# Altium PCB SPARKy watch PCB blank - David.PcbDoc
Units mm, origin at the board's own origin, x right, y up, seen from the top; angles counter-clockwise.
Board outline 50 x 29.64 mm, 2 copper layers (Component Side, Bottom Layer), stack 0.325 mm thick; 94 components, 72 nets, 347 pads, 9 vias.
Unrouted connection lines stored in the file: 240.
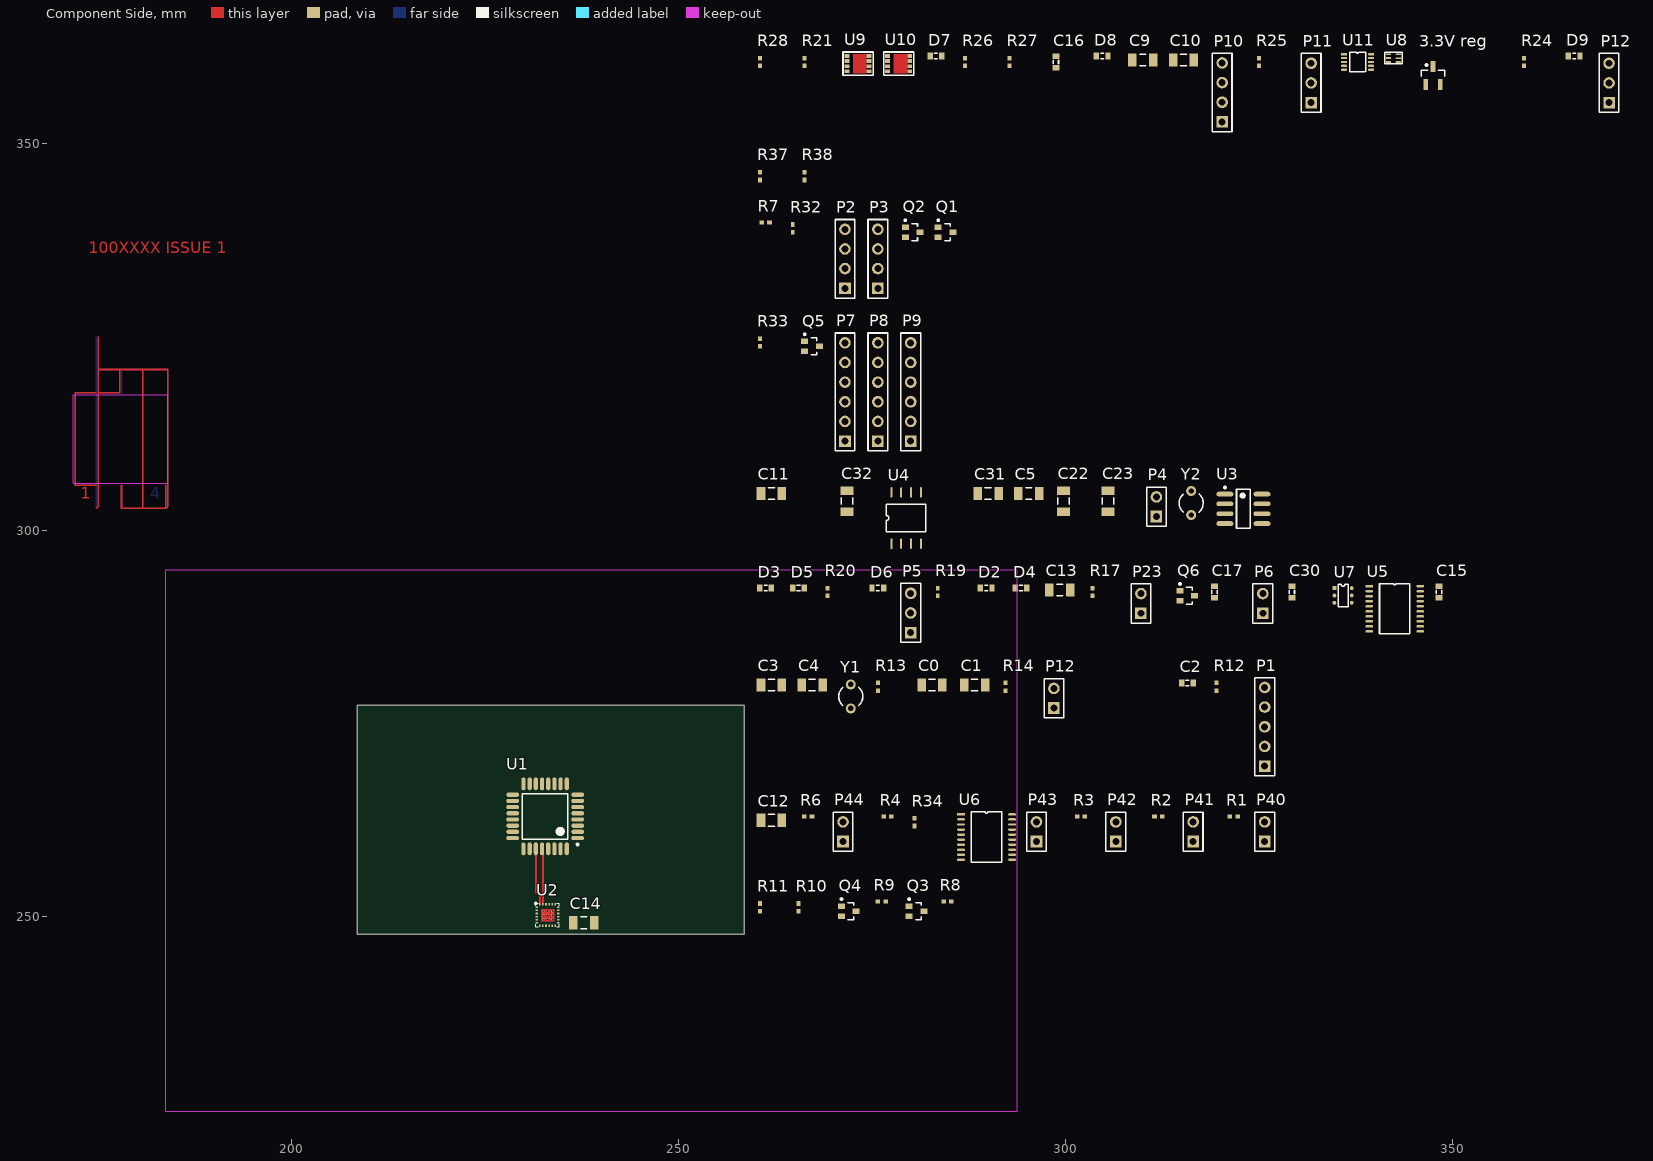
[diagram p0: Component Side view]
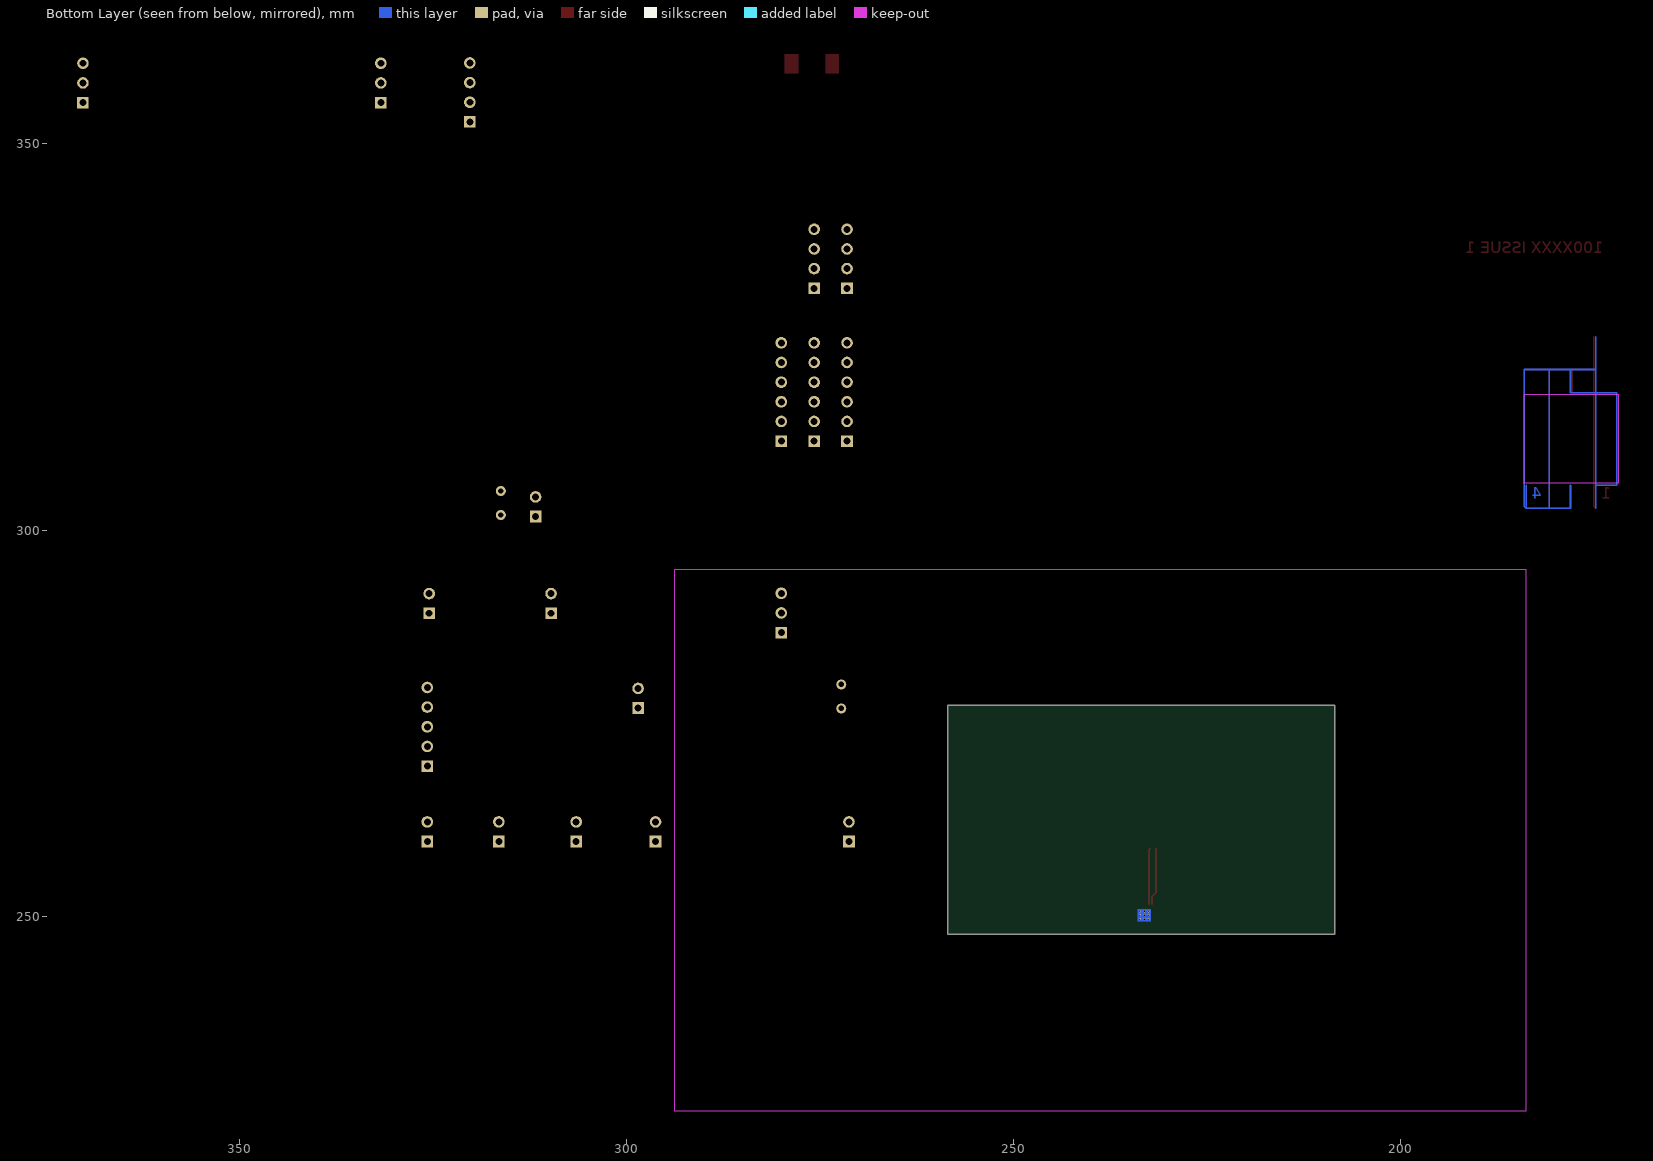
[diagram p1: Bottom Layer view, seen from below]

## Layer stack, top to bottom
Top Solder: solder mask 0.0102, Solder Resist, Dk 3.5
Component Side: signal copper 0.0356
Dielectric 1: core 0.254, FR-4, Dk 4.2
Bottom Layer: signal copper 0.0356
Solder Side: solder mask 0.0102, Solder Resist, Dk 3.5

## Board outline
208.5,247.75 208.5,277.387 258.5,277.387 258.5,247.75

## Design rules (kind name [scope] priority, off if disabled: settings)
AcuteAngle [All] p1: minimum=9.00000000000000E+0001 checktracksonly=FALSE
AssemblyTestpoint [All] p1: testpointundercomponent=TRUE minsize=1 maxsize=2.5 preferedsize=1.5 minholesize=0 maxholesize=1 preferedholesize=0.8 testpointgrid=0.025 usegrid=TRUE gridtolerance=0 allowsidetop=TRUE allowsidebottom=TRUE
Clearance "Clearance Ceramic to Board" [InComponentClass('Ceramic') vs ((ObjectKind = 'Arc') Or (ObjectKind = 'Track')) And (Layer = 'KeepOutLayer') And (Keepout = 'False')] p1: gap=4.95 // Ceramic component to board outline
Clearance [All] p2: gap=0.15
ComponentClearance [All] p1: gap=0.25 collisioncheckmode=3 verticalgap=0.25 showdistances=FALSE
DiffPairsRouting [All] p1: maxlimit=0.1 minlimit=0.1 mostfreqgap=0.1 toplayer_minwidth=0.15 toplayer_maxwidth=0.15 toplayer_prefwidth=0.15 bottomlayer_minwidth=0.15 bottomlayer_maxwidth=0.15 bottomlayer_prefwidth=0.15 maxuncoupledlength=12.7
FabricationTestpoint [All] p1: side=3 testpointundercomponent=TRUE minsize=1 maxsize=2.5 preferedsize=1.5 minholesize=0 maxholesize=1 preferedholesize=0.8 testpointgrid=0.025 allowsidetop=TRUE allowsidebottom=TRUE usegrid=TRUE gridtolerance=0
Height [All] p1: minheight=0 maxheight=50 prefheight=12.5
HoleSize [All] p1: absolutevalues=TRUE maxlimit=6.5 minlimit=0.3 maxpercent=80.000 minpercent=20.000
HoleToHoleClearance [All] p1: gap=0.25 allowstackedmicrovias=TRUE
MinimumAnnularRing [All] p1: minimumring=0.15
MinimumSolderMaskSliver [All] p1: minsoldermaskwidth=0.15
PlaneClearance [All] p1: clearance=0.5
PlaneConnect [All] p1: planeconnectstyle=Relief reliefexpansion=0.5 reliefentries=4 reliefconductorwidth=0.25 reliefairgap=0.25
PolygonConnect [All] p1: connectstyle=Relief reliefconductorwidth=0.25 reliefentries=4 polygonreliefangle="90 Angle" airgapwidth=0.25
RoutingCorners [All] p1: cornerstyle=45-Degree minsetback=2.5 maxsetback=2.5
RoutingVias [All] p1: holewidth=0.5 width=0.8 viastyle="Through Hole" minholewidth=0.3 minwidth=0.6 maxholewidth=0.7 maxwidth=1
SilkToSilkClearance [All] p1: silktosilkclearance=0.25
SilkToSolderMaskClearance [IsPad] p1: minsilkscreentomaskgap=0.25 clearancetoexposedcopper=TRUE
SolderMaskExpansion [All] p1: expansion=0.075
UnpouredPolygon [All] p1: allowunpoured=FALSE
Width [All] p1: maxlimit=1 minlimit=0.15 preferedwidth=0.2
16 further rules are at their usual default settings.

## Classes and differential pairs
component class "battery sensor": Q3 Q4 R8 R9 R10 R11
component class Designator: C12 P40 P41 P42 P43 P44 R1 R2 R3 R4 R6 R34 U6
component class Prefrels: C13 C15 C17 C30 D2 D3 D4 D5 D6 P5 P6 P23 Q6 R17 R19 R20 U5 U7
component class RTC: C5 C11 C14 C22 C23 C31 C32 P4 U2 U3 U4 Y2
component class Screens: P7 P8 P9 Q5 R33
component class "Serial devices": P2 P3 Q1 Q2 R7 R32
component class "SparkyTime Project": R37 R38
component class "V stuff": "3.3V reg" C9 C10 C16 D7 D8 D9 P10 P11 P12 R21 R24 R25 R26 R27 R28 U8 U9 U10 U11

## Components (designator, comment, footprint, x,y, rotation, side; value= is the part's Value field where it differs from the comment)
"3.3V reg" "Volt Reg" SOT23_M 347.499,358.749 r90 top
C0 "Cap Semi" C1206 282.749,279.999 r0 top
C1 "Cap Semi" C1206 288.249,279.999 r0 top
C2 "Cap" J1-0603 315.749,280.249 r0 top
C3 "Cap Semi" C1206 261.999,279.999 r0 top
C4 "Cap Semi" C1206 267.249,279.999 r0 top
C5 "Cap Semi" C1206 295.249,304.749 r0 top
C9 "Cap Semi" C1206 309.999,360.749 r0 top
C10 "Cap Semi" C1206 315.249,360.749 r0 top
C11 "Cap Semi" C1206 261.999,304.749 r0 top
C12 "Cap Semi" C1206 261.999,262.499 r0 top
C13 "Cap Semi" C1206 299.249,292.249 r0 top
C14 "Cap Semi" C1206 237.75,249.25 r0 top
C15 "Cap" J1-0603 348.249,291.999 r90 top
C16 "Cap" J1-0603 298.749,360.499 r90 top
C17 "Cap" J1-0603 319.249,291.999 r90 top
C22 "Cap" C1206 299.749,303.749 r90 top
C23 "Cap" C1206 305.499,303.749 r90 top
C30 "C16" J1-0603 329.249,291.999 r90 top
C31 "Cap Semi" C1206 289.999,304.749 r0 top
C32 "Cap Semi" C1206 271.749,303.749 r90 top
D2 "Diode" J1-0603 289.749,292.499 r0 top
D3 "Diode" J1-0603 261.249,292.499 r0 top
D4 "Diode" J1-0603 294.249,292.499 r0 top
D5 "Diode" J1-0603 265.499,292.499 r0 top
D6 "de ??" J1-0603 275.749,292.499 r0 top
D7 "FULL" J1-0603 283.249,361.249 r0 top
D8 "Chargeing" J1-0603 304.749,361.249 r0 top
D9 "power ok" J1-0603 365.749,361.249 r0 top
P1 "FTDI headder" HDR1X5 325.749,269.499 r90 top
P2 "ESP8266" HDR1X4 271.499,331.249 r90 top
P3 "RN42-1/rm" HDR1X4 275.749,331.249 r90 top
P4 "Header 2" HDR1X2 311.749,301.749 r90 top
P5 "External Port" HDR1X3 279.999,286.749 r90 top
P6 "Header Lasar" HDR1X2 325.499,289.249 r90 top
P7 "Screen 1" HDR1X6 271.499,311.499 r90 top
P8 "Screen 2" HDR1X6 275.749,311.499 r90 top
P9 "Screen 3" HDR1X6 279.999,311.499 r90 top
P10 "USB" HDR1X4 320.249,352.749 r90 top
P11 "battery header" HDR1X3 331.749,355.249 r90 top
P12 "Buzzer" HDR1X2 298.499,276.999 r90 top
P12 "V rails" HDR1X3 370.249,355.249 r90 top
P23 "LED conector" HDR1X2 309.749,289.249 r90 top
P40 "SW1 (enter)" HDR1X2 325.749,259.749 r90 top
P41 "SW2 (Escape)" HDR1X2 316.499,259.749 r90 top
P42 "SW3" HDR1X2 306.499,259.749 r90 top
P43 "SW4" HDR1X2 296.249,259.749 r90 top
P44 "SW5" HDR1X2 271.249,259.749 r90 top
Q1 "2N7000" ONSC-SOT-323-3-419-04_V 284.499,338.499 r0 top
Q2 "2N7000" ONSC-SOT-323-3-419-04_V 280.249,338.499 r0 top
Q3 "MESFET-N" ONSC-SOT-323-3-419-04_V 280.749,250.749 r0 top
Q4 "MESFET-P" ONSC-SOT-323-3-419-04_V 271.999,250.749 r0 top
Q5 "2N7000" ONSC-SOT-323-3-419-04_V 267.249,323.749 r0 top
Q6 "2N7000" ONSC-SOT-323-3-419-04_V 315.749,291.499 r0 top
R1 "Res1" 0402 321.749,262.999 r0 top
R2 "Res1" 0402 311.999,262.999 r0 top
R3 "Res1" 0402 301.999,262.999 r0 top
R4 "Res1" 0402 276.999,262.999 r0 top
R6 "Res1" 0402 266.749,262.999 r0 top
R7 "Res3" 0402 261.249,339.749 r0 top
R8 "Res3" 0402 284.749,251.999 r0 top
R9 "Res3" 0402 276.249,251.999 r0 top
R10 "Res3" 0402 265.499,251.249 r90 top
R11 "Res11" 0402 260.499,251.249 r90 top
R12 "Res1" 0402 319.499,279.749 r90 top
R13 "Res1" 0402 275.749,279.749 r90 top
R14 "Res1" 0402 292.249,279.749 r90 top
R17 "Res1" 0402 303.499,291.999 r90 top
R19 "Res1" 0402 283.499,291.999 r90 top
R20 "Res1" 0402 269.249,291.999 r90 top
R21 "Res1" 0402 266.249,360.499 r90 top
R24 "Res1" 0402 359.249,360.499 r90 top
R25 "Res1" 0402 324.999,360.499 r90 top
R26 "Res1" 0402 286.999,360.499 r90 top
R27 "Res1" 0402 292.749,360.499 r90 top
R28 "Res1" 0402 260.499,360.499 r90 top
R32 "Res3" 0402 264.749,338.999 r90 top
R33 "Res3" 0402 260.499,324.249 r90 top
R34 "Res1" 0402 280.499,262.249 r90 top
R37 "Res1" 0402 260.499,345.749 r90 top
R38 "Res1" 0402 266.249,345.749 r90 top
U1 "ATmega8-16AU" 32A_N 232.75,263 r180 top
U2 "Component_1" MPU-9255 231.661,251.25 r0 top
U3 "MCP79412T-I/SN" SOIC-SN8_N 322.999,302.749 r0 top
U4 "Component_1" SOP8 277.499,298.249 r90 top
U5 "Component_1" SOP20 339.249,292.749 r0 top
U6 "Component_1" SOP20 286.499,263.249 r0 top
U7 "LTC3200" SOP6 334.749,292.499 r0 top
U8 "bq29700" DSE 341.749,361.499 r0 top
U9 "CSD16406Q3" Q3 271.749,361.249 r0 top
U10 "CSD16406Q3" Q3 276.999,361.249 r0 top
U11 "MCP73833/4" SOP10 335.999,361.499 r0 top
Y1 "16MHz" R38 272.249,278.499 r0 top
Y2 "32.768Mhz" R38 316.249,303.499 r0 top

## Footprints (in the part's own frame and the unit in brackets; to place one, negate y for a bottom-side part, rotate by r counter-clockwise, add the part's x,y. Pads: shape width x height; smd on the part's side, far side on the other; paste and mask are expansions set on the pad)
32A_N [mm] "Thin QFP, 32-Leads, Body 7x7mm, Pitch 0.8mm, IPC Medium Density"
  oval 1.65x0.55 smd: 1(-4.2,2.8) 2(-4.2,2) 3(-4.2,1.2) 4(-4.2,0.4) 5(-4.2,-0.4) 6(-4.2,-1.2) 7(-4.2,-2) 8(-4.2,-2.8) 17(4.2,-2.8) 18(4.2,-2) 19(4.2,-1.2) 20(4.2,-0.4) 21(4.2,0.4) 22(4.2,1.2) 23(4.2,2) 24(4.2,2.8)
  oval 0.55x1.65 smd: 9(-2.8,-4.2) 10(-2,-4.2) 11(-1.2,-4.2) 12(-0.4,-4.2) 13(0.4,-4.2) 14(1.2,-4.2) 15(2,-4.2) 16(2.8,-4.2) 25(2.8,4.2) 26(2,4.2) 27(1.2,4.2) 28(0.4,4.2) 29(-0.4,4.2) 30(-1.2,4.2) 31(-2,4.2) 32(-2.8,4.2)
  silkscreen extent -4.33,-2.95 2.95,3.75, body extent -3.5,-3.5 3.5,3.5, height 1.2
0402 [mm] "Chip Capacitor, Body 1.0x0.5mm, IPC High Density"
  rect 0.6x0.5 smd: 1(-0.5,0) 2(0.5,0)
  body extent -0.55,-0.3 0.55,0.3, height 1.3
C1206 [mm] "Chip Capacitor, Body 3.2x1.6mm, IPC High Density"
  rect 1.1x1.7 smd: 1(-1.35,0) 2(1.35,0)
  silkscreen extent -0.4,-0.75 0.4,0.75, body extent -1.7,-0.9 1.7,0.9, height 1.3
DSE [mm]
  rect 0.7x0.23 smd: 1(0,0)
  oval 0.7x0.23 smd: 2(0,-0.5) 3(0,-1) 4(1.27,-1.016) 5(1.27,-0.516) 6(1.27,-0.016)
  silkscreen extent -0.51,-1.25 1.78,0.25
HDR1X2 [mm] "Connector; Header; 2 Position"
  rect 1.5x1.5 hole 0.9: 1(0,0)
  round 1.5 hole 0.9: 2(2.54,0)
  silkscreen extent -1.27,-1.27 3.81,1.27
HDR1X3 [mm] "Connector; Header; 3 Position"
  rect 1.5x1.5 hole 0.9: 1(0,0)
  round 1.5 hole 0.9: 2(2.54,0) 3(5.08,0)
  silkscreen extent -1.27,-1.27 6.35,1.27
HDR1X4 [mm] "Connector; Header; 4 Position"
  rect 1.5x1.5 hole 0.9: 1(0,0)
  round 1.5 hole 0.9: 2(2.54,0) 3(5.08,0) 4(7.62,0)
  silkscreen extent -1.27,-1.27 8.89,1.27
HDR1X5 [mm] "Connector; Header; 5 Position"
  rect 1.5x1.5 hole 0.9: 1(0,0)
  round 1.5 hole 0.9: 2(2.54,0) 3(5.08,0) 4(7.62,0) 5(10.16,0)
  silkscreen extent -1.27,-1.27 11.43,1.27
HDR1X6 [mm] "Connector; Header; 6 Position"
  rect 1.5x1.5 hole 0.9: 1(0,0)
  round 1.5 hole 0.9: 2(2.54,0) 3(5.08,0) 4(7.62,0) 5(10.16,0) 6(12.7,0)
  silkscreen extent -1.27,-1.27 13.97,1.27
J1-0603 [mm] "Chip Resistor, Body 1.6x0.8mm, IPC High Density"
  rect 0.7x0.9 smd: 1(-0.75,0) 2(0.75,0)
  silkscreen extent -0.2,-0.35 0.2,0.35, body extent -0.85,-0.48 0.85,0.48, height 0.9
MPU-9255 [mm]
  rect 0.3x0.2 smd: 1(0,0) 2(0,-0.4) 3(0,-0.8) 4(0,-1.2) 5(0,-1.6) 6(0,-2) 13(2.8,-2) 14(2.8,-1.6) 15(2.8,-1.2) 16(2.8,-0.8) 17(2.8,-0.4) 18(2.8,0)
  rect 0.2x0.3 smd: 7(0.4,-2.4) 8(0.8,-2.4) 9(1.2,-2.4) 10(1.6,-2.4) 11(2,-2.4) 12(2.4,-2.4) 19(2.4,0.4) 20(2,0.4) 21(1.6,0.4) 22(1.2,0.4) 23(0.8,0.4) 24(0.4,0.4)
  Component Side region: 0.552,-1.817 2.302,-1.817 2.302,-0.227 0.552,-0.227
  Bottom Layer region: 0.549,-1.812 2.299,-1.812 2.299,-0.222 0.549,-0.222
  silkscreen extent -0.23,-2.5 2.9,0.61
ONSC-SOT-323-3-419-04_V [mm] "SOT23, 3-Leads, Body 2x1.25mm, Pitch 0.65mm"
  rect 0.9x0.7 smd: 1(-0.95,0.65) 2(-0.95,-0.65) 3(0.95,0)
  silkscreen extent -1.07,-1.1 0.63,1.67, body extent -0.63,-1 0.63,1, height 1
Q3 [mm]
  rect 0.63x0.5 smd: 1(0,0) 2(0,-0.65) 3(0,-1.3) 4(0,-1.95) 5(2.87,-1.95) 6(2.87,-1.3) 7(2.87,-0.65) 8(2.87,0)
  Component Side region: 0.76,-2.246 2.56,-2.246 2.56,0.304 0.76,0.304
  silkscreen extent -0.5,-2.45 3.38,0.53
R38 [mm] "Crystal, Thru-Hole; 2 Leads; Body 3.1 x 8.2 mm (Dia.xH)"
  round 1.3 hole 0.7: 1(0,1.55) 2(0,-1.55)
  silkscreen extent -1.55,-1.19 1.55,1.17
SOIC-SN8_N [mm] "SOIC, 8-Leads, Body 4.9x3.8mm, Pitch 1.27mm, IPC Medium Density"
  oval 2.2x0.6 smd: 1(-2.4,1.905) 2(-2.4,0.635) 3(-2.4,-0.635) 4(-2.4,-1.905) 5(2.4,-1.905) 6(2.4,-0.635) 7(2.4,0.635) 8(2.4,1.905)
  silkscreen extent -2.52,-2.5 0.9,2.88, body extent -2,-2.5 2,2.5, height 1.75
SOP6 [mm]
  rect 0.5x0.5 smd: 1(0,0)
  round 0.5 smd: 2(0,-0.95) 3(0,-1.9) 4(2.25,-1.9) 5(2.25,-0.95) 6(2.25,0)
  silkscreen extent 0.51,-2.41 1.78,0.48
SOP8 [mm]
  rect 1.345x0.25 smd: 1(0,0)
  oval 1.345x0.25 smd: 2(0,-1.27) 3(0,-2.54) 4(0,-3.81) 5(6.62,-3.81) 6(6.62,-2.54) 7(6.62,-1.27) 8(6.62,0)
  silkscreen extent 1.51,-4.44 5.11,0.64
SOP10 [mm]
  rect 0.8x0.3 smd: 1(0,0)
  oval 0.8x0.3 smd: 2(0,-0.5) 3(0,-1) 4(0,-1.5) 5(0,-2) 6(3.5,-2) 7(3.5,-1.5) 8(3.5,-1) 9(3.5,-0.5) 10(3.5,0)
  silkscreen extent 0.76,-2.25 2.79,0.25
SOP20 [mm]
  rect 1x0.32 smd: 1(0,0)
  oval 1x0.32 smd: 2(0,-0.65) 3(0,-1.3) 4(0,-1.95) 5(0,-2.6) 6(0,-3.25) 7(0,-3.9) 8(0,-4.55) 9(0,-5.2) 10(0,-5.85) 11(6.6,-5.85) 12(6.6,-5.2) 13(6.6,-4.55) 14(6.6,-3.9) 15(6.6,-3.25) 16(6.6,-2.6) 17(6.6,-1.95) 18(6.6,-1.3) 19(6.6,-0.65) 20(6.6,0)
  silkscreen extent 1.33,-6.18 5.27,0.33
SOT23_M [mm] "SOT23, 3-Leads, Body 2.9x1.3mm, Pitch 0.95mm, Lead Span 2.3mm - Reverse Pinning, IPC Low Density"
  rect 1.45x0.6 smd: 1(1.175,0) 2(-1.175,-0.95) 3(-1.175,0.95)
  silkscreen extent -0.1,-1.5 1.47,1.5, body extent -0.7,-1.5 0.7,1.5, height 1.1

## Part data
"3.3V reg": "Voltage Regulator"
C0 C1 C3 C4 C5 C9 C10 C11 C12 C13 C14 C31 C32: "Capacitor (Semiconductor SIM Model)"
C2 C15 C16 C17 C22 C23: "Capacitor"
C30: library part Cap, "Capacitor"
D2 D3 D4 D5: "Default Diode"
D6: library part Diode, "Default Diode"
D7 D8 D9: library part LED1, "Typical RED GaAs LED"
P1: library part "Header 5", "Header, 5-Pin"
P2 P3 P10: library part "Header 4", "Header, 4-Pin"
P4: "Header, 2-Pin"
P5 P11 P12: library part "Header 3", "Header, 3-Pin"
P6 P12 P23 P40 P41 P42 P43 P44: library part "Header 2", "Header, 2-Pin"
P7 P8 P9: library part "Header 6", "Header, 6-Pin"
Q1 Q2 Q5 Q6: "Small Signal MOSFET, 200 mA, 60 V, N-Channel, 3-Pin TO-92, Bulk Box"
Q3: "N-Channel MESFET"
Q4: "P-Channel MESFET"
R1 R2 R3 R4 R6 R7 R8 R9 R10 R12 R13 R14 R17 R19 R20 R21 R24 R25 R26 R27 R28 R32 R33 R34 R37 R38: "Resistor"
R11: library part Res3, "Resistor"
U1: "8-bit AVR Microcontroller, 4.5-5.5V, 16MHz, 8KB Flash, 512 Bytes EEPROM, 1KB SRAM, 32-pin TQFP, Industrial Grade (-40°C to 85°C)"
U3: "I2C Real-Time Clock/Calendar with EEPROM, SRAM, Unique ID and Battery Switchover, 8-Pin SOIC, Industrial Temperature, Tape and Reel"
U7 U8 U9 U10 U11: library part Component_1
Y1 Y2: library part XTAL, "Crystal Oscillator"

## Via types
v1: diameter 0.25, hole 0.2, Component Side to Bottom Layer, 9 vias

## Nets (pads, with @x,y where several pads share a name; then routed paths per layer and width w, separated by ;. In a path a pad name is that pad's centre, name@x,y a point inside that pad or via, vN(x,y) a via of type N, cw(c..) or ccw(c..) an arc to the next point about the centre after c; other vN are vias at no path point)
3.3V: "3.3V reg.3" C0.2 C5.2 C10.2 C11.2 C12.2 C13.2 C31.1 C32.2 D7.1 D8.1 P12.2@370.249,357.789 P40.2 P41.2 P42.2 P43.2 P44.2 Q1.3 Q2.3 R12.1 R13.2 R34.2 U1.4 U1.6 U1.18 U2.1 U2.8 U2.13 U2.22 U3.8 U4.8 U5.5 U6.5 U6.6
GND: "3.3V reg.2" C0.1 C1.1 C3.1 C4.1 C5.1 C9.1 C10.1 C11.1 C12.1 C13.1 C14.1 C22.1 C23.1 C30.2 C31.2 C32.1 D3.1 D5.1 P1.5 P2.2 P3.2 P4.1 P5.3 P6.1 P7.2 P8.2 P9.2 P10.1 P12.3 P23.2 Q4.1 R1.1 R2.1 R3.1 R4.1 R6.1 R7.1 R10.1 R11.1 R14.1 R17.1 R27.2 R28.1 R32.1 R33.1 U1.3 U1.5 U1.19 U1.21 U1.22 U2.9 U2.11 U2.18 U2.20 U3.4 U4.3 U4.4 U4.7 U5.6 U5.7 U5.9 U5.15 U6.7 U6.9 U6.13 U7.2 U9.1 U9.2 U9.3 U11.5
NetC1_2: C1.2 U1.20
NetC2_1: C2.1 P1.1
NetC2_2: C2.2 R12.2 U1.29
NetC3_2: C3.2 U1.8 Y1.1
NetC4_2: C4.2 U1.7 Y1.2
NetC14_2: C14.2 U2.10
NetC15_1: C15.1 U5.17 U7.3
NetC16_1: C16.1 P11.3 U8.6 U10.1 U10.2 U10.3
NetC16_2: C16.2 R25.2 U8.5
NetC17_1: C17.1 U7.4
NetC17_2: C17.2 U7.6
NetC22_2: C22.2 U3.2 Y2.1
NetC23_2: C23.2 U3.1 Y2.2
NetC30_1: C30.1 P6.2 U7.1
NetD2_1: D2.1 D3.2 R20.1 U1.9
NetD4_1: D4.1 D5.2 R19.1 U1.26
NetD6_1: D6.1 R20.2
NetD6_2: D6.2 P5.2
NetD7_2: D7.2 R21.1
NetD8_2: D8.2 R26.1
NetD9_1: D9.1 P10.4 U11.1 U11.2
NetD9_2: D9.2 R24.1
NetP1_2: P1.2 P2.3 P3.3 U1.30
NetP1_3: P1.3 P2.4 P3.4 U1.31
NetP2_1: P2.1 Q1.1
NetP3_1: P3.1 Q2.1
NetP4_2: P4.2 U3.3
NetP5_1: P5.1 R19.2
NetP7_1: P7.1 P8.1 P9.1 Q5.1
NetP7_3: P7.3 P8.3 P9.3 U1.17 U4.6
NetP7_4: P7.4 P8.4 P9.4 U1.16 U4.5
NetP7_5: P7.5 U1.14
NetP7_6: P7.6 U1.13
NetP8_5: P8.5 U1.11
NetP8_6: P8.6 U1.10
NetP9_5: P9.5 U1.2
NetP9_6: P9.6 R13.1 U1.1 U3.7
NetP11_2: P11.2 U11.8
NetP12_1: P12.1@298.499,276.999 U1.25
NetP12_2: P12.2@298.499,279.539 R14.2
NetP23_1: P23.1 Q6.1
NetP40_1: P40.1 R1.2 U6.17
NetP41_1: P41.1 R2.2 U6.16
NetP42_1: P42.1 R3.2 U6.14
NetP43_1: P43.1 R4.2 U6.12
NetP44_1: P44.1 R6.2 U6.11
NetQ1_2: Q1.2 R32.2 U5.11
NetQ2_2: Q2.2 R7.2 U5.12
NetQ3_2: Q3.2 Q4.3 R8.1
NetQ3_3: Q3.3 R9.2
NetQ4_2: Q4.2 R11.2 U5.20
NetQ5_2: Q5.2 R33.2 U5.16
NetQ6_2: Q6.2 R17.2 U5.14
NetR9_1: R9.1 R10.2 U1.24
NetR21_2: R21.2 U6.20 U11.4
NetR24_2: R24.2 U11.7
NetR26_2: R26.2 U6.19 U11.3
NetR27_1: R27.1 U8.4
NetR28_2: R28.2 U11.6
NetR34_1: R34.1 U1.32 U6.1
NetR37_1: R37.1 U1.28 U2.23 U3.6 U5.2 U6.2 | length 7.2
  Component Side w0.254: U1.28 232.465,258.685 U2.23@232.465,251.65
NetR38_1: R38.1 U1.27 U2.24 U3.5 U5.4 U6.4 | length 7.4
  Component Side w0.254: U1.27 231.55,253.186 232.061,252.675 U2.24
NetU1_12: U1.12 U4.1
NetU1_15: U1.15 U4.2
NetU2_12: U2.12 U6.10
NetU8_2: U8.2 U9.4
NetU8_3: U8.3 U10.4
NetU9_5: U9.5 U9.6 U9.7 U9.8 U10.5 U10.6 U10.7 U10.8
"V BAT": "3.3V reg.1" C9.2 C15.2 D2.2 D4.2 P1.4 P11.1 P12.1@370.249,355.249 Q3.1 Q5.3 Q6.3 R8.2 R25.1 U7.5 U11.9 U11.10
VCC: R37.2 R38.2
pads on no net: P10.2 P10.3 U1.23 U2.2 U2.3 U2.4 U2.5 U2.6 U2.7 U2.14 U2.15 U2.16 U2.17 U2.19 U2.21 U5.1 U5.3 U5.8 U5.10 U5.13 U5.18 U5.19 U6.3 U6.8 U6.15 U6.18 U8.1
copper on no net: | length 247.4
  Component Side w0.2: 174.75,302.793 175,303.043 175,320.75 177.75,320.75 ; 174.75,305.793 172,305.793 172,317.75 174.75,317.75 ; 175,325 175,317.75 177.75,317.75 177.75,320.75 ; 178,305.793 178,302.793 180.75,302.793 ; 183.75,305.793 183.75,302.793 ; 177.75,320.75 180.75,320.75 ; 180.75,302.793 180.75,320.75 ; 180.75,302.793 183.75,302.793 ; 180.75,302.793 180.75,320.75 ; 180.75,320.75 184,320.75 184,303.043 183.75,302.793
  Bottom Layer w0.2: 174.75,302.793 174.75,320.75 178,320.75 178,317.75 174.75,317.75 ; 174.75,305.793 172,305.793 172,317.75 174.75,317.75 ; 174.75,325 174.75,317.75 ; 177.75,320.75 180.75,320.75 ; 178,305.793 178,302.793 180.75,302.793 ; 183.75,305.793 183.75,302.793 ; 180.75,302.793 180.75,320.75 ; 180.75,302.793 183.75,302.793 ; 180.75,302.793 180.75,320.75 ; 180.75,320.75 184,320.75 184,303.043 183.75,302.793
  other v1: 232.558,249.734 233.058,249.734 233.658,249.734 232.558,250.234 233.058,250.234 233.658,250.234 232.558,250.734 233.058,250.734 233.658,250.734

## Keep-outs
Keep-Out Layer:
  lines w0.1: 171.75,306.043 184,306.043 184,317.5 171.75,317.5 171.75,306.043 ; 183.75,224.863 293.75,224.863 293.75,294.863 183.75,294.863 183.75,224.863

## Other copper
Component Side:
  text "100XXXX ISSUE 1" at 173.75,335.25 h2.5
  text "1" at 172.75,303.543 h2.5
  text "4" at 405.662,105.85 h3
  text "TOP ELEC" at 434.35,105.85 h3
Bottom Layer:
  text "4" at 181.75,303.5 h2.5
  text "11" at 404.384,105.85 h3
  text "BOTTOM ELEC" at 434.35,105.85 h3

## Silkscreen, mask and mechanical layers (free items; w line width, h text height)
Top Paste:
  text "2" at 405.662,105.85 h3
  text "TOP SOLDER PASTE" at 434.35,105.85 h3
Bottom Paste:
  text "13" at 404.384,105.85 h3
  text "BOTTOM SOLDER PASTE" at 434.35,105.85 h3
Top Solder:
  rectangle: 192.75,340.25 205.25,343.75
  text "3" at 405.662,105.85 h3
  text "TOP SOLDER RESIST" at 434.35,105.85 h3
Solder Side:
  rectangle: 177.25,343.5 189.75,347
  text "12" at 404.384,105.85 h3
  text "BOTTOM SOLDER RESIST" at 434.35,105.85 h3
Mechanical 5:
  drawing of 6820 lines, arcs and shapes, not listed
  text "1" at 138.126,384.5 h4
  text "2" at 186.222,384.5 h4
  text "3" at 234.722,384.5 h4
  text "4" at 283.222,384.5 h4
  text "5" at 331.722,384.5 h4
  text "6" at 380.222,384.5 h4
  text "7" at 428.722,384.5 h4
  text "8" at 477.222,384.5 h4
  text "DO NOT SCALE - IF IN DOUBT ASK" at 265.25,376.5 h6
  text "A" at 503.897,368.98 h4
  text "A" at 101.359,364.134 h4
  text "B" at 503.897,320.48 h4
  text "B" at 101.359,315.634 h4
  text "C" at 503.897,271.98 h4
  text "C" at 101.359,267.134 h4
  text "D" at 503.897,223.48 h4
  text "D" at 101.359,218.634 h4
  text "E" at 503.864,174.921 h4
  text "E" at 101.359,170.134 h4
  text "NO. OF LAYERS:" at 169.088,149.85 h3
  text "GENERAL NOTES" at 237.338,149.85 h3
  text "DR'N:" at 469.588,149.85 h3
  text "THE INFORMATION CONTAINED" at 111.338,148.6 h4.5
  text "PROJECTION" at 447.338,147.85 h3
  text "MATERIAL:" at 169.088,145.85 h3
  text "FR4 TO IPC4101/99 OR ABOVE WITH" at 184.838,145.85 h3
  text "1. THIS PCB SHALL BE MANUFACTURED IN ACCORDANCE WITH IPC-6012 CLASS 2." at 237.338,145.85 h3
  text "DATE:" at 469.588,145.85 h3
  text "HEREIN SHALL NOT BE REPRODUCED" at 106.088,143.85 h4.5
  text "A  FLIR  COMPANY" at 417.778,142.337 h3
  text "MINIMUM Tg RATING OF 170" at 184.838,141.85 h3
  text "2. MANUFACTURER LOGO AND UL MARK (94V-0) TO BE ADDED TO SOLDER RESIST ARTWORK IN AREA SHOWN." at 237.338,141.85 h3
  text "CK'D:" at 469.588,141.85 h3
  text "WITHOUT THE PRIOR" at 119.338,139.1 h4.5
  text "BOARD THICKNESS:" at 169.088,137.85 h3
  text "OVER PLATING" at 206.588,137.85 h3
  text "3. ALL PCB'S TO BE ELECTRICALY TESTED TO IPC-9252." at 237.338,137.85 h3
  text "DATE:" at 469.588,137.85 h3
  text "C" at 398.781,136.359 h4
  text "2014 RAYMARINE LTD" at 404.781,136.359 h4
  text "WRITTEN PERMISSION OF" at 116.338,134.6 h4.5
  text "SURFACE FINISH:" at 169.088,133.85 h3
  text "ENIG TO IPC-4552 CLASS 2" at 194.088,133.85 h3
  text "4. PCB NUMBER, ISSUE AND TITLE TO BE INCLUDED IN COPPER ON LAYER 1." at 237.338,133.85 h3
  text "TEXT TO BE IN UPPER CASE AND" at 340.588,133.85 h3
  text "APPR:" at 469.588,133.85 h3
  text "RAYMARINE LTD" at 123.338,130.1 h4.5
  text "SOLDER RESIST:" at 169.088,129.85 h3
  text "GREEN PHOTO IMAGEABLE TO" at 194.088,129.85 h3
  text "BETWEEN 1.5mm AND 4.0mm IN HEIGHT." at 240.588,129.85 h3
  text "DIMENSIONS IN MM" at 407.088,129.85 h3
  text "SCALE:" at 447.088,129.85 h3
  text "1:1" at 460.338,129.85 h3
  text "PROJECT:" at 469.588,129.85 h3
  text "F" at 101.359,127.798 h4
  text "TOLERANCES UNLESS OTHERWISE STATED" at 107.338,125.85 h3
  text "IPC-SM-840 CLASS T" at 194.088,125.85 h3
  text "5. PANEL WASTE AREA TO INCLUDE COPPER HATCHING." at 237.338,125.85 h3
  text "TITLE:" at 397.088,125.85 h3
  text "F" at 504.122,123.722 h4
  text "X" at 109.838,121.85 h3
  text "+/- 0.50" at 120.088,121.85 h3
  text "SHARP INTERNAL" at 139.588,121.85 h3
  text "MINIMUM TRACK WIDTH:" at 169.088,121.85 h3
  text "6. WHERE APPLICABLE IMPEDANCE TEST COUPONS SHALL BE SUPPLIED." at 237.338,121.85 h3
  text ".X" at 109.338,117.85 h3
  text "+/- 0.25" at 120.088,117.85 h3
  text "CORNERS TO HAVE" at 138.088,117.85 h3
  text "MINIMUM TRACK SPACING:" at 169.088,117.85 h3
  text "7. REFER TO PURCHASE ORDER FOR DEVIATIONS FROM THIS DRAWING." at 237.338,117.85 h3
  text "DRAWING No." at 397.088,116.1 h3
  text "REVISION:" at 449.588,116.1 h3
  text ".XX" at 109.338,113.85 h3
  text "+/- 0.10" at 120.088,113.85 h3
  text "HAVE RADIUS 0.80" at 139.088,113.85 h3
  text "CONTROLLED IMPEDANCE BUILD:" at 169.088,113.85 h3
  text "8. SOLDER MASK: NO BLOCKING OF PINS WITHOUT WRITTEN PERMISSION OF RAYMARINE" at 237.338,113.6 h3
  text "A" at 496.588,113.1 h8
  text ".XXX" at 109.338,109.85 h3
  text "+/- 0.05" at 120.088,109.85 h3
  text "MAX UNLESS" at 142.088,109.85 h3
  text "9. SURFACE MICROVIAS TO BE FILLED TO IPC SPECIFICATIONS" at 237.338,109.75 h3
  text "3" at 497.338,106.35 h8
  text "ANGLES   +/- 1" at 109.588,105.85 h3
  text "OTHERWISE STATED" at 137.338,105.85 h3
  text "SHT        OF" at 397.088,105.85 h3
  text "13" at 413.753,105.85 h3
  text "LAYER:" at 423.338,105.85 h3
  text "1" at 133.236,101.243 h4
  text "2" at 181.332,101.243 h4
  text "3" at 229.835,101.243 h4
  text "4" at 278.335,101.243 h4
  text "5" at 326.992,101.243 h4
  text "8" at 472.507,101.18 h4
  text "6" at 375.462,101.116 h4
  text "7" at 424.022,100.988 h4
Mechanical 6:
  drawing of 6830 lines, arcs and shapes, not listed
  text "1" at 138.126,682.607 h4
  text "2" at 186.222,682.607 h4
  text "3" at 234.722,682.607 h4
  text "4" at 283.222,682.607 h4
  text "5" at 331.722,682.607 h4
  text "6" at 380.222,682.607 h4
  text "7" at 428.722,682.607 h4
  text "8" at 477.222,682.607 h4
  text "DO NOT SCALE - IF IN DOUBT ASK" at 265.25,674.607 h6
  text "A" at 503.897,667.087 h4
  text "A" at 101.359,662.242 h4
  text "B" at 503.897,618.587 h4
  text "B" at 101.359,613.742 h4
  text "C" at 503.897,570.087 h4
  text "C" at 101.359,565.242 h4
  text "D" at 503.897,521.587 h4
  text "D" at 101.359,516.742 h4
  text "E" at 503.864,473.028 h4
  text "REV." at 397,470.957 h2
  text "REVISION DESCRIPTION" at 432.5,470.957 h2
  text "ECN/ECO" at 492.5,470.957 h2
  text "E" at 101.359,468.242 h4
  text "1" at 398.5,468.207 h2
  text "INITIAL DESIGN" at 403.162,468.207 h2
  text "E-XX-XXXX" at 491.915,468.207 h2
  text "GENERAL NOTES" at 169.088,447.957 h3
  text "DR'N:" at 469.588,447.957 h3
  text ".ASY_Drawn_By" at 478.088,447.955 h3
  text "THE INFORMATION CONTAINED" at 111.338,446.707 h4.5
  text "PROJECTION" at 447.338,445.957 h3
  text "1. THIS PCB SHALL BE ASSEMBLED IN ACCORDANCE WITH IPC-A-610 CLASS 2." at 169.088,443.957 h3
  text "DATE:" at 469.588,443.957 h3
  text ".ASY_Drawn_Date" at 478.088,443.951 h3
  text "HEREIN SHALL NOT BE REPRODUCED" at 106.088,441.957 h4.5
  text "A  FLIR  COMPANY" at 417.778,440.445 h3
  text "2. ALL ASPECTS OF THE MANUFACTURE OF THIS ASSEMBLY SHALL BE ROHS COMPLIANT." at 169.088,440.028 h3
  text "CK'D:" at 469.588,439.957 h3
  text ".ASY_Checked_By" at 478.088,439.957 h3
  text "WITHOUT THE PRIOR" at 119.338,437.207 h4.5
  text "DATE:" at 469.588,435.957 h3
  text ".ASY_Checked_Date" at 478.088,435.957 h3
  text "C" at 398.781,434.466 h4
  text "2014 RAYMARINE LTD" at 404.781,434.466 h4
  text "WRITTEN PERMISSION OF" at 116.338,432.707 h4.5
  text "APPR:" at 469.588,431.957 h3
  text "RAYMARINE LTD" at 123.338,428.207 h4.5
  text "DIMENSIONS IN MM" at 407.088,427.957 h3
  text "SCALE:" at 447.088,427.957 h3
  text "3:1" at 460.338,427.957 h3
  text "PROJECT:" at 469.588,427.957 h3
  text ".PCB_Project" at 484.588,427.957 h3
  text "F" at 101.359,425.905 h4
  text "TOLERANCES UNLESS OTHERWISE STATED" at 107.338,423.957 h3
  text "TITLE:" at 397.088,423.957 h3
  text ".PCB_Title" at 408.5,423.25 h4
  text "F" at 504.122,421.83 h4
  text "X" at 109.838,419.957 h3
  text "+/- 0.50" at 120.088,419.957 h3
  text "SHARP INTERNAL" at 139.588,419.957 h3
  text ".X" at 109.338,415.957 h3
  text "+/- 0.25" at 120.088,415.957 h3
  text "CORNERS TO HAVE" at 138.088,415.957 h3
  text "DRAWING No." at 397.088,414.207 h3
  text "REVISION:" at 449.588,414.207 h3
  text ".XX" at 109.338,411.957 h3
  text "+/- 0.10" at 120.088,411.957 h3
  text "HAVE RADIUS 0.80" at 139.088,411.957 h3
  text "A" at 496.588,411.207 h8
  text ".ASY_Number" at 397.088,408.207 h8
  text ".ASY_Revision" at 449.838,408.207 h8
  text ".XXX" at 109.338,407.957 h3
  text "+/- 0.05" at 120.088,407.957 h3
  text "MAX UNLESS" at 142.088,407.957 h3
  text "3" at 497.338,404.457 h8
  text "ANGLES   +/- 1" at 109.588,403.957 h3
  text "OTHERWISE STATED" at 137.338,403.957 h3
  text "SHT        OF" at 397.088,403.957 h3
  text "4" at 413.588,403.957 h3
  text "LAYER:" at 423.338,403.957 h3
  text "1" at 133.236,399.35 h4
  text "2" at 181.332,399.35 h4
  text "3" at 229.835,399.35 h4
  text "4" at 278.335,399.35 h4
  text "5" at 326.992,399.35 h4
  text "8" at 472.507,399.288 h4
  text "6" at 375.462,399.224 h4
  text "7" at 424.022,399.095 h4
Mechanical 7:
  drawing of 6830 lines, arcs and shapes, not listed
  text "8" at 130.166,682.607 h4
  text "7" at 178.667,682.607 h4
  text "6" at 227.167,682.607 h4
  text "5" at 275.667,682.607 h4
  text "4" at 324.167,682.607 h4
  text "3" at 372.667,682.607 h4
  text "2" at 421.167,682.607 h4
  text "1" at 469.263,682.607 h4
  text "DO NOT SCALE - IF IN DOUBT ASK" at 342.138,674.607 h6
  text "A" at 103.491,667.087 h4
  text "A" at 506.03,662.242 h4
  text "B" at 103.491,618.587 h4
  text "B" at 506.03,613.742 h4
  text "C" at 103.491,570.087 h4
  text "C" at 506.03,565.242 h4
  text "D" at 103.491,521.587 h4
  text "D" at 506.03,516.742 h4
  text "E" at 103.524,473.028 h4
  text "ECN/ECO" at 114.888,470.957 h2
  text "REVISION DESCRIPTION" at 174.888,470.957 h2
  text "REV." at 210.388,470.957 h2
  text "E" at 506.03,468.242 h4
  text "E-XX-XXXX" at 115.473,468.207 h2
  text "INITIAL DESIGN" at 204.227,468.207 h2
  text "1" at 208.888,468.207 h2
  text ".ASY_Drawn" at 129.3,447.955 h3
  text "DR'N:" at 137.8,447.957 h3
  text "GENERAL NOTES" at 438.3,447.957 h3
  text "THE INFORMATION CONTAINED" at 496.05,446.707 h4.5
  text "PROJECTION" at 160.05,445.957 h3
  text "DATE:" at 137.8,443.957 h3
  text "1. THIS PCB SHALL BE ASSEMBLED IN ACCORDANCE WITH IPC-A-610 CLASS 2." at 438.3,443.957 h3
  text ".ASY_Drawn_Date" at 129.3,443.951 h3
  text "HEREIN SHALL NOT BE REPRODUCED" at 501.3,441.957 h4.5
  text "A  FLIR  COMPANY" at 189.611,440.445 h3
  text "2. ALL ASPECTS OF THE MANUFACTURE OF THIS ASSEMBLY SHALL BE ROHS COMPLIANT." at 438.3,440.028 h3
  text ".ASY_Checked" at 129.3,439.957 h3
  text "CK'D:" at 137.8,439.957 h3
  text "WITHOUT THE PRIOR" at 488.05,437.207 h4.5
  text ".ASY_Checked_Date" at 129.3,435.957 h3
  text "DATE:" at 137.8,435.957 h3
  text "2014 RAYMARINE LTD" at 202.608,434.466 h4
  text "C" at 208.608,434.466 h4
  text "WRITTEN PERMISSION OF" at 491.05,432.707 h4.5
  text "APPR:" at 137.8,431.957 h3
  text "RAYMARINE LTD" at 484.05,428.207 h4.5
  text ".PCB_Project" at 122.8,427.957 h3
  text "PROJECT:" at 137.8,427.957 h3
  text "1:1" at 147.05,427.957 h3
  text "SCALE:" at 160.3,427.957 h3
  text "DIMENSIONS IN MM" at 200.3,427.957 h3
  text "F" at 506.03,425.905 h4
  text "TITLE:" at 210.3,423.957 h3
  text "TOLERANCES UNLESS OTHERWISE STATED" at 500.05,423.957 h3
  text ".PCB_Title" at 201.25,423.25 h4
  text "F" at 103.266,421.83 h4
  text "SHARP INTERNAL" at 467.8,419.957 h3
  text "+/- 0.50" at 487.3,419.957 h3
  text "X" at 497.55,419.957 h3
  text "CORNERS TO HAVE" at 469.3,415.957 h3
  text "+/- 0.25" at 487.3,415.957 h3
  text ".X" at 498.05,415.957 h3
  text "REVISION:" at 157.8,414.207 h3
  text "DRAWING No." at 210.3,414.207 h3
  text "HAVE RADIUS 0.80" at 468.3,411.957 h3
  text "+/- 0.10" at 487.3,411.957 h3
  text ".XX" at 498.05,411.957 h3
  text "A" at 110.8,411.207 h8
  text ".ASY_Revision" at 157.55,408.207 h8
  text ".ASY_Number" at 210.3,408.207 h8
  text "MAX UNLESS" at 465.3,407.957 h3
  text "+/- 0.05" at 487.3,407.957 h3
  text ".XXX" at 498.05,407.957 h3
  text "3" at 110.05,404.457 h8
  text "LAYER:" at 184.05,403.957 h3
  text "4" at 193.8,403.957 h3
  text "SHT        OF" at 210.3,403.957 h3
  text "OTHERWISE STATED" at 470.05,403.957 h3
  text "ANGLES   +/- 1" at 497.8,403.957 h3
  text "5" at 280.396,399.35 h4
  text "4" at 329.053,399.35 h4
  text "3" at 377.553,399.35 h4
  text "2" at 426.057,399.35 h4
  text "1" at 474.152,399.35 h4
  text "8" at 134.881,399.288 h4
  text "6" at 231.926,399.224 h4
  text "7" at 183.366,399.095 h4
Mechanical 10:
  lines w0.1: 183.75,224.863 183.75,294.863 293.75,294.863 293.75,224.863 183.75,224.863
Mechanical 13:
  text "TOP ASSEMBLY" at 440.5,419 h2.5
  text "1" at 405.338,403.957 h3
Mechanical 14:
  text "TOP ASSEMBLY CONVENTIONAL" at 434,419 h2.5
  text "2" at 405.75,403.957 h3
Drill Drawing:
  drawing of 295 lines, arcs and shapes, not listed
  text "SEE NOTE 2" at 180.25,505.75 h4
  text "CONTROLLED IMPEDANCE REQUIREMENTS" at 118.85,380.507 h2.5
  text "Layer" at 366.926,379.507 h2.5
  text "Name" at 377.646,379.507 h2.5
  text "Material" at 403.742,379.507 h2.5
  text "Thickness" at 425.95,379.507 h2.5
  text "Constant" at 441.145,379.507 h2.5
  text "Board Layer Stack" at 455.226,379.507 h2.5
  text "Filename" at 484.038,379.507 h2.5
  text "TRACK" at 107.85,376.757 h2.5
  text "REFERENCE" at 119.85,376.757 h2.5
  text "TRACK" at 155.85,376.757 h2.5
  text "TRACK" at 169.1,376.757 h2.5
  text "IMPEDANCE" at 137.85,375.507 h2.5
  text "1" at 366.926,374.507 h2.5
  text "Top Silk" at 377.646,374.507 h2.5
  text ".PCB_Number" at 478.038,374.507 h2.5
  text "-" at 486.708,374.507 h2.5
  text ".PCB_Revision" at 487.538,374.507 h2.5
  text ".GTO" at 488.588,374.507 h2.5
  text "LAYER" at 108.1,374.257 h2.5
  text "LAYER/S" at 121.85,374.257 h2.5
  text "WIDTH" at 156.1,374.257 h2.5
  text "SPACING" at 168.1,374.257 h2.5
  text "TOP ELEC" at 106.35,370.507 h2.5
  text "INNER X" at 122.1,370.507 h2.5
  text "50 OHM SE" at 138.35,370.507 h2.5
  text "XXXum" at 156.35,370.507 h2.5
  text "N/A" at 171.1,370.507 h2.5
  text "2" at 366.926,369.507 h2.5
  text "Top Solder Resist" at 377.646,369.507 h2.5
  text "Solder Resist" at 403.742,369.507 h2.5
  text "0.010mm" at 425.95,369.507 h2.5
  text "3.5" at 441.145,369.507 h2.5
  text ".PCB_Number" at 478.038,369.507 h2.5
  text "-" at 486.708,369.507 h2.5
  text ".PCB_Revision" at 487.538,369.507 h2.5
  text ".GTS" at 488.588,369.507 h2.5
  text "INNER X" at 107.35,366.757 h2.5
  text "INNER X" at 122.1,366.757 h2.5
  text "100 OHM DIFF" at 137.1,366.757 h2.5
  text "XXXum" at 156.35,366.757 h2.5
  text "XXXum" at 169.6,366.757 h2.5
  text "3" at 366.926,364.507 h2.5
  text "Top Elec" at 377.646,364.507 h2.5
  text "Copper" at 403.742,364.507 h2.5
  text "0.035mm" at 425.95,364.507 h2.5
  text ".PCB_Number" at 478.038,364.507 h2.5
  text "-" at 486.708,364.507 h2.5
  text ".PCB_Revision" at 487.538,364.507 h2.5
  text ".GTL" at 488.588,364.507 h2.5
  text "INNER X" at 107.35,363.007 h2.5
  text "INNER X" at 122.1,363.007 h2.5
  text "90 OHM DIFF" at 137.85,363.007 h2.5
  text "XXXum" at 156.35,363.007 h2.5
  text "XXXum" at 169.6,363.007 h2.5
  text "4" at 366.926,359.507 h2.5
  text "Dielectric 1" at 377.646,359.507 h2.5
  text "Shengyi S1000-2" at 403.742,359.507 h2.5
  text "0.140mm" at 425.95,359.507 h2.5
  text "4.2" at 441.145,359.507 h2.5
  text "BOT ELEC" at 106.35,359.257 h2.5
  text "INNER X" at 122.1,359.257 h2.5
  text "50 OHM SE" at 138.6,359.257 h2.5
  text "XXXum" at 156.35,359.257 h2.5
  text "N/A" at 171.1,359.257 h2.5
  text "5" at 366.926,354.507 h2.5
  text "Layer 2" at 377.646,354.507 h2.5
  text "Copper" at 403.742,354.507 h2.5
  text "0.017mm" at 425.95,354.507 h2.5
  text ".PCB_Number" at 478.038,354.507 h2.5
  text "-" at 486.708,354.507 h2.5
  text ".PCB_Revision" at 487.538,354.507 h2.5
  text ".G1" at 488.588,354.507 h2.5
  text "6" at 366.926,349.507 h2.5
  text "Dielectric 2" at 377.646,349.507 h2.5
  text "1.200mm" at 425.95,349.507 h2.5
  text "4.2" at 441.145,349.507 h2.5
  text "7" at 366.926,344.507 h2.5
  text "Layer 3" at 377.646,344.507 h2.5
  text "Copper" at 403.742,344.507 h2.5
  text "0.017mm" at 425.95,344.507 h2.5
  text ".PCB_Number" at 478.038,344.507 h2.5
  text "-" at 486.708,344.507 h2.5
  text ".PCB_Revision" at 487.538,344.507 h2.5
  text ".G2" at 488.588,344.507 h2.5
  text "8" at 366.926,339.507 h2.5
  text "Dielectric 3" at 377.646,339.507 h2.5
  text "Shengyi S1000-2" at 403.742,339.507 h2.5
  text "0.140mm" at 425.95,339.507 h2.5
  text "4.2" at 441.145,339.507 h2.5
  text "9" at 366.926,334.507 h2.5
  text "Bottom Elec" at 377.646,334.507 h2.5
  text "Copper" at 403.742,334.507 h2.5
  text "0.035mm" at 425.95,334.507 h2.5
  text ".PCB_Number" at 478.038,334.515 h2.5
  text "-" at 486.708,334.515 h2.5
  text ".PCB_Revision" at 487.538,334.515 h2.5
  text ".GBL" at 488.588,334.515 h2.5
  text "10" at 366.926,329.507 h2.5
  text "Bottom Solder Resist" at 377.646,329.507 h2.5
  text "Solder Resist" at 403.742,329.507 h2.5
  text "0.010mm" at 425.95,329.507 h2.5
  text "3.5" at 441.145,329.507 h2.5
  text ".PCB_Number" at 478.038,329.507 h2.5
  text "-" at 486.708,329.507 h2.5
  text ".PCB_Revision" at 487.538,329.507 h2.5
  text ".GBS" at 488.588,329.507 h2.5
  text "11" at 366.926,324.507 h2.5
  text "Bottom Silk" at 377.646,324.507 h2.5
  text ".PCB_Number" at 478,324.507 h2.5
  text "-" at 486.67,324.507 h2.5
  text ".PCB_Revision" at 487.5,324.507 h2.5
  text ".GBO" at 488.55,324.507 h2.5
  text "ADDITIONAL DATA" at 415.25,266.5 h4
  text "FABRICATION DRAWING (THIS DRAWING)" at 366.322,259.5 h2.5
  text ".PCB_Number" at 478.038,259.507 h2.5
  text "-" at 486.708,259.5 h2.5
  text ".PCB_Revision" at 487.538,259.5 h2.5
  text ".GD1" at 488.588,259.507 h2.5
  text "PLATING DRILL FILE" at 366.322,254.5 h2.5
  text ".PCB_Number" at 478.038,254.507 h2.5
  text "-" at 486.708,254.507 h2.5
  text ".PCB_Revision" at 487.538,254.507 h2.5
  text ".TXT" at 488.588,254.507 h2.5
  text "NON PLATED DRILL FILE" at 366.322,249.5 h2.5
  text ".PCB_Number" at 478.038,249.507 h2.5
  text "-" at 486.708,249.507 h2.5
  text ".PCB_Revision" at 487.538,249.507 h2.5
  text ".DRR" at 488.588,249.515 h2.5
  text ".IPC" at 488.588,244.515 h2.5
  text "IPC-D-356 NETLIST" at 366.322,244.5 h2.5
  text ".PCB_Number" at 478.038,244.507 h2.5
  text "-" at 486.708,244.5 h2.5
  text ".PCB_Revision" at 487.538,244.5 h2.5
  text "_FAB.ZIP" at 488.588,239.515 h2.5
  text "FABRICATION DATA ZIP FILE" at 366.322,239.5 h2.5
  text ".PCB_Number" at 478.038,239.507 h2.5
  text "-" at 486.708,239.507 h2.5
  text ".PCB_Revision" at 487.538,239.507 h2.5
  text ".PCB_Number" at 477.788,234.5 h2.5
  text "-" at 486.458,234.5 h2.5
  text ".PCB_Revision" at 487.288,234.5 h2.5
  text ".GTP" at 488.338,234.5 h2.5
  text "TOP PASTE" at 366.246,234.243 h2.5
  text ".PCB_Number" at 477.996,229.25 h2.5
  text "-" at 486.666,229.25 h2.5
  text ".PCB_Revision" at 487.496,229.25 h2.5
  text ".GBP" at 488.546,229.25 h2.5
  text "BOTTOM PASTE" at 366.246,229.015 h2.5
  text "Symbol" at 108.965,175.433 h3.6
  text "Qty" at 123.715,175.433 h3.6
  text "Finished Hole Size" at 137.476,175.433 h3.6
  text "Plated" at 168.333,175.433 h3.6
  text "Hole Type" at 181.36,175.433 h3.6
  text "Tolerance" at 200.03,175.433 h3.6
  text "REV." at 397,172.85 h2
  text "REVISION DESCRIPTION" at 432.5,172.85 h2
  text "ECN/ECO" at 492.5,172.85 h2
  text "1" at 398.5,170.1 h2
  text "INITIAL DESIGN" at 403.162,170.1 h2
  text "E-XX-XXXX" at 491.915,170.1 h2
  text "9" at 123.715,168.575 h3
  text "0.20mm" at 137.476,168.575 h3
  text "PTH" at 168.333,168.575 h3
  text "Round" at 181.36,168.575 h3
  text "4" at 123.715,161.716 h3
  text "0.70mm" at 137.476,161.716 h3
  text "PTH" at 168.333,161.716 h3
  text "Round" at 181.36,161.716 h3
  text "62" at 123.715,154.858 h3
  text "0.90mm" at 137.476,154.858 h3
  text "PTH" at 168.333,154.858 h3
  text "Round" at 181.36,154.858 h3
  text ".PCB_Electrical_Layer_Qty." at 192.088,149.85 h3
  text ".PCB_Drawn_By" at 478.588,149.85 h3
  text "75 Total" at 123.715,148 h3
  text ".PCB_Drawn_Date" at 478.588,145.85 h3
  text ".PCB_Checked_By" at 478.588,141.85 h3
  text ".PCB_Board_Thickness" at 196.588,137.85 h3
  text ".PCB_Checked_Date" at 478.588,137.85 h3
  text ".PCB_Project" at 484.588,129.85 h3
  text ".PCB_Min_Track" at 203.838,121.85 h3
  text ".PCB_Title" at 397.088,120.6 h5
  text ".PCB_Min_Space" at 206.338,117.85 h3
  text ".PCB_Controlled_Impedance_Build" at 215.338,113.85 h3
  text ".PCB_Number" at 397.088,110.1 h8
  text ".PCB_Revision" at 449.838,110.1 h8
  text "1" at 405.662,105.85 h3
  text "FABRICATION DRAWING" at 434.35,105.85 h3
Mechanical 18:
  lines w0.2: 512.238,346.19 549.068,346.19 ; 512.238,350 549.068,350 ; 512.238,353.81 549.068,353.81 ; 512.238,357.62 549.068,357.62 ; 512.238,361.43 549.068,361.43 ; 512.238,365.24 549.068,365.24 ; 512.238,369.05 549.068,369.05 ; 512.238,372.86 549.068,372.86 ; 512.238,376.67 549.068,376.67 ; 512.238,380.48 549.068,380.48 ; 512.238,384.29 684.323,384.29 ; 521.128,342.38 521.128,384.29 ; 534.463,342.38 534.463,384.29 ; 549.068,228.08 684.323,228.08 ; 549.068,231.89 684.323,231.89 ; 549.068,334.76 549.068,388.1 ; 571.293,224.27 571.293,231.89 ; 512.238,342.38 512.238,388.1 684.323,388.1 684.323,224.27 549.068,224.27 549.068,342.38 512.238,342.38
  text "HISTORY" at 513.508,385.5 h2.5
  text "DESIGN COMMENTS" at 550.338,385.25 h2.5
  text "ISSUE" at 513.5,381.5 h2.5
  text "DESIGNER" at 522.25,381.5 h2.5
  text "DATE" at 538.75,381.5 h2.5
  text "IDF FILENAME" at 550.338,228.715 h1.42
  text "SCHEMATIC FILE" at 550.338,224.905 h1.42
Mechanical 23:
  text "BOTTOM ASSEMBLY" at 168.5,419 h2.5
  text "3" at 202.6,403.957 h3
Mechanical 24:
  text "BOTTOM ASSEMBLY CONVENTIONAL" at 177.75,419 h2.5
  text "4" at 202.05,403.957 h3